# Altium PCB PCB1.PcbDoc
Units mm, origin at the board's own origin, x right, y up, seen from the top; angles counter-clockwise.
Board outline 66.17 x 88.65 mm, 2 copper layers (Top Layer, Bottom Layer); 17 components, 17 nets, 81 pads, 14 vias.
Unrouted connection lines stored in the file: 7.
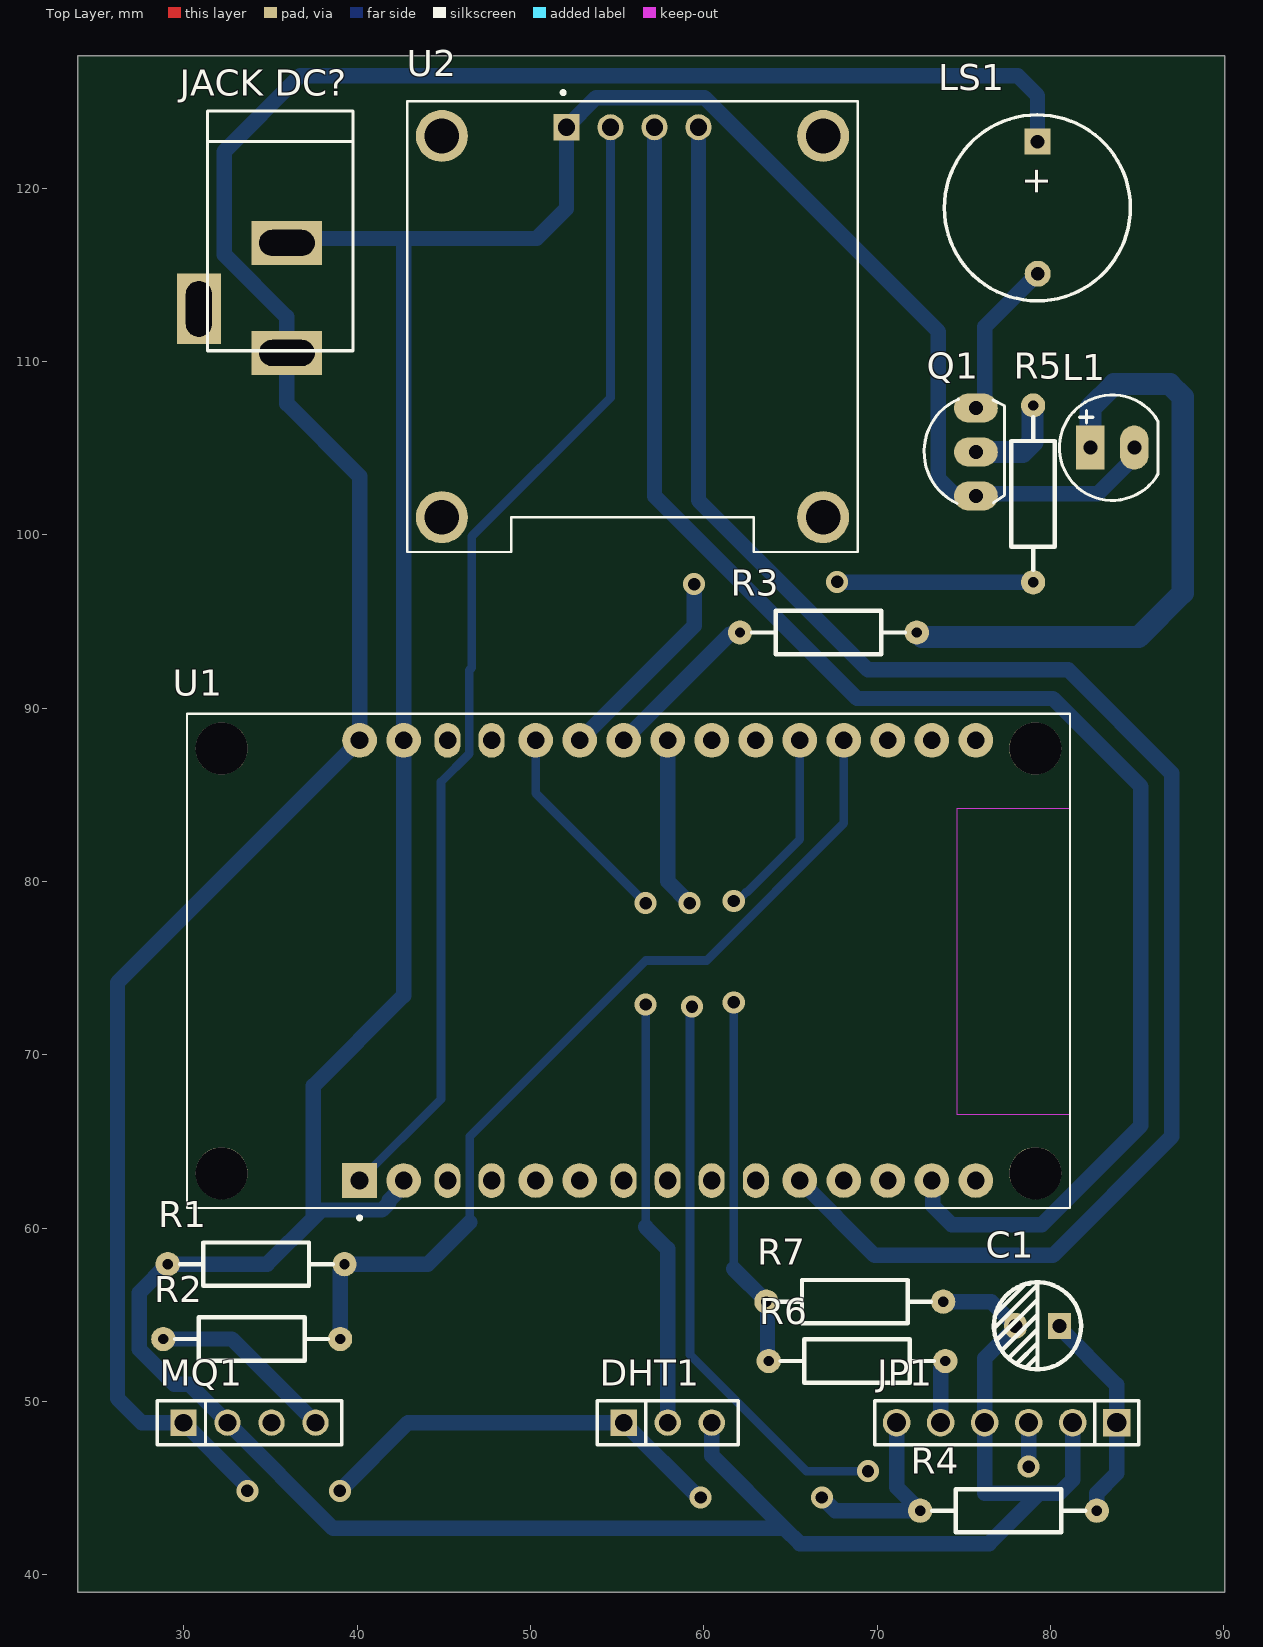
[diagram p0: Top Layer view]
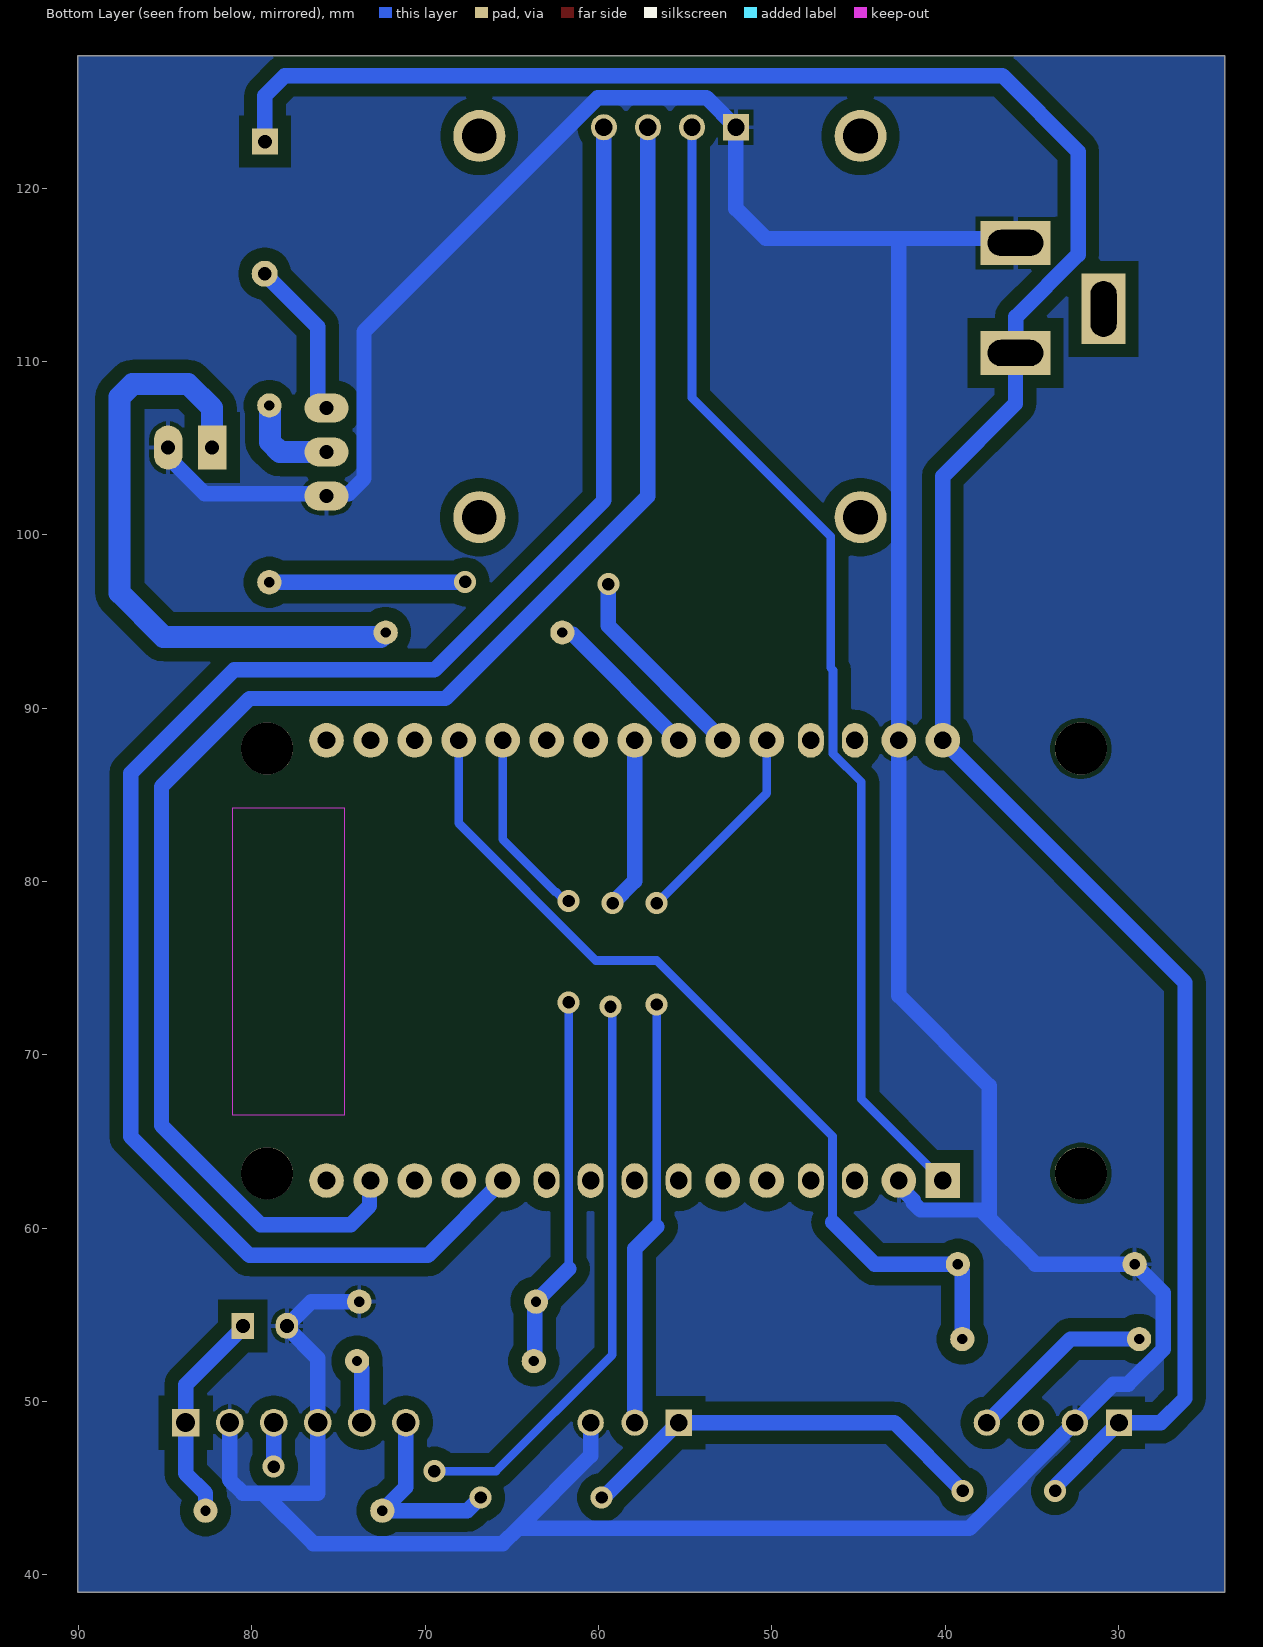
[diagram p1: Bottom Layer view, seen from below]
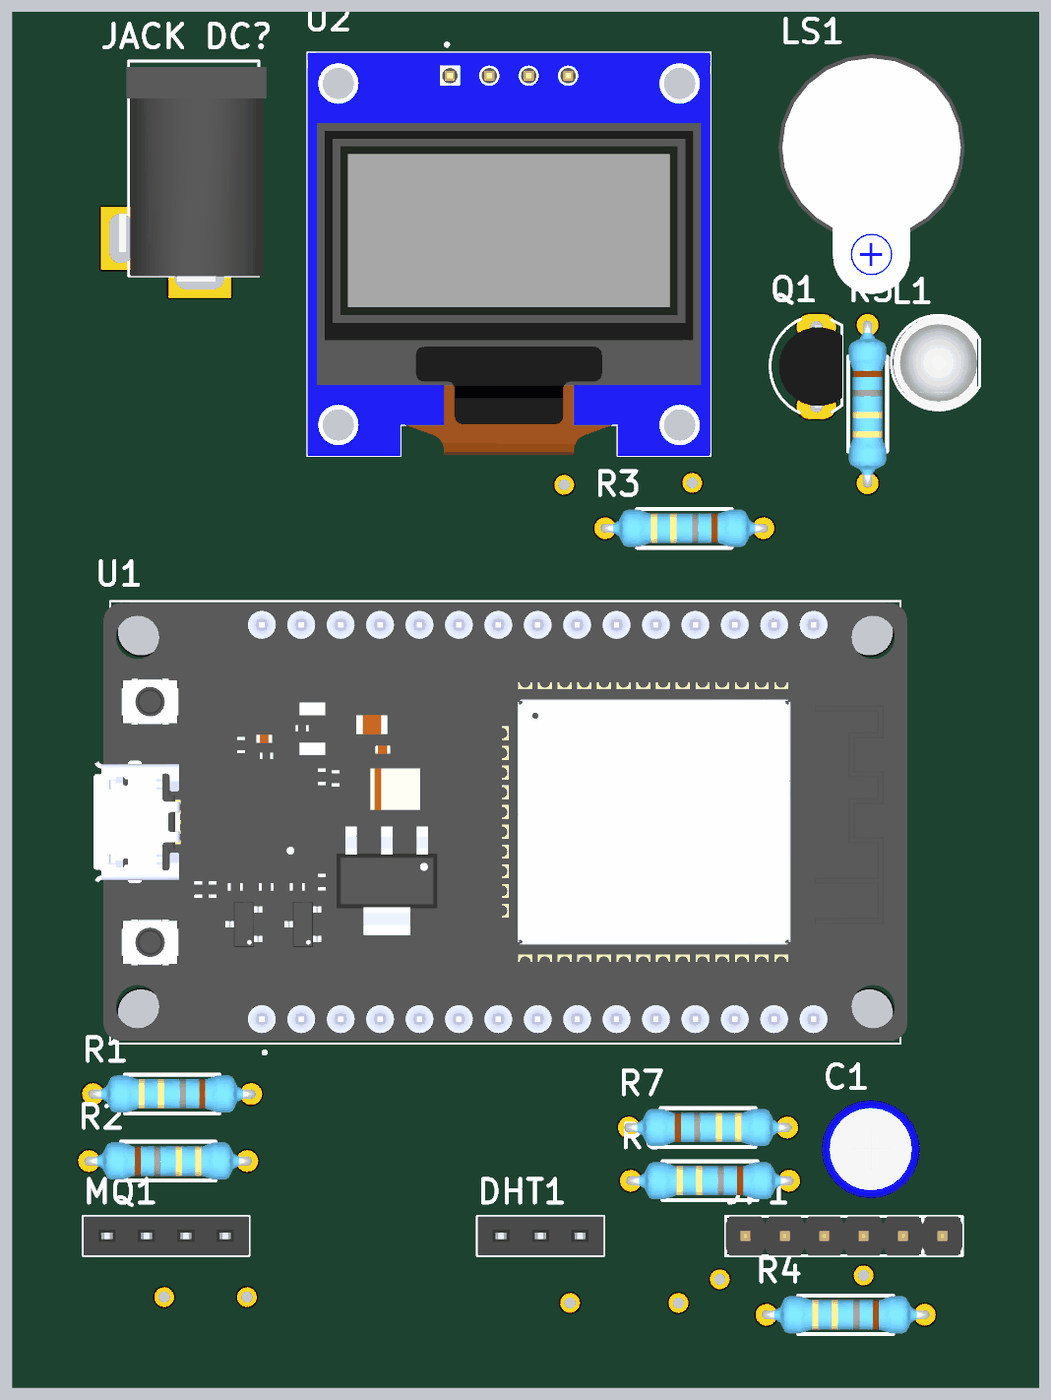
[diagram p2: 3D render of the assembled board from above, using the file's embedded part models]

## Layer stack, top to bottom
Top Solder: solder mask 0.0102, Solder Resist, Dk 3.5
Top Layer: signal copper 0.0356
Dielectric 1: dielectric 0.32, FR-4, Dk 4.8
Bottom Layer: signal copper 0.0356
Bottom Solder: solder mask 0.0102, Solder Resist, Dk 3.5

## Board outline
23.876,38.989 90.043,38.989 90.043,127.635 23.876,127.635

## Design rules (kind name [scope] priority, off if disabled: settings)
Clearance [All] p1: gap=0.254 ignorepadtopadclearanceinfootprint=FALSE except(0.762: Arc-Fill Arc-Poly Arc-Region Track-Fill Track-Poly Track-Region SMDPad-Fill SMDPad-Poly SMDPad-Region THPad-Fill THPad-Poly THPad-Region Via-Fill Via-Poly Via-Region Fill-Fill Fill-Poly Fill-Region Poly-Poly Poly-Region Region-Region)
PolygonConnect [All] p1: connectstyle=Relief reliefconductorwidth=0.254 reliefentries=4 polygonreliefangle="90 Angle" airgapwidth=0.254
RoutingLayers [All] p1: top layer_v5=FALSE bottom layer_v5=TRUE
RoutingVias [All] p1: holewidth=0.711 width=1.27 viastyle="Through Hole" minholewidth=0.711 minwidth=1.27 maxholewidth=0.711 maxwidth=1.27
SolderMaskExpansion [All] p1: expansion=0.102 istentingtop=FALSE
SupplyNets "Schematic Supply Nets_2" [InNet('+5')] p1: voltage=0.000
SupplyNets "Schematic Supply Nets_1" [InNet('GND')] p2: voltage=0.000
SupplyNets "Schematic Supply Nets" [InNet('3v3')] p3: voltage=0.000
Width [All] p1: maxlimit=1.27 minlimit=0.254 preferedwidth=0.889
29 further rules are at their usual default settings.

## Components (designator, comment, footprint, x,y, rotation, side; value= is the part's Value field where it differs from the comment)
C1 "100uF" "tu hoa 5mm" 79.248,54.356 r180 top
DHT1 "DHT22" "JP 1x3 CT" 55.372,48.768 r0 top
"JACK DC?" "JACK DC 5.5" "JACK DC 5.5" 33.401,113.665 r270 top value="Jac DC"
JP1 "JP 1x6 2.54" "JP 1x6 DT" 83.82,48.768 r180 top
L1 "LED 5mm" LED-5MM-RED 82.296,105.029 r0 top
LS1 "Coi Chip Speaker" "Coi Chip Speacker" 79.248,122.682 r270 top
MQ1 "MQ135" "JP 1x4 CT" 29.972,48.768 r0 top
Q1 "2N2222" TO92 75.692,104.775 r90 top value=C9014
R1 "39k" "tro vach 1/4w" 34.163,57.912 r0 top
R2 "22k" "tro vach 1/4w" 33.909,53.594 r180 top
R3 "220R" "tro vach 1/4w" 67.183,94.361 r0 top
R4 "180R" "tro vach 1/4w" 77.577,43.688 r0 top
R5 "1k" "tro vach 1/4w" 78.994,102.362 r90 top
R6 "22k" "tro vach 1/4w" 68.834,52.324 r0 top
R7 "39k" "tro vach 1/4w" 68.707,55.753 r180 top
U1 "ESP32-DEVKIT-V1" MODULE_ESP32_DEVKIT_V1 55.647,75.438 r90 top
U2 "DM-OLED096-636" MODULE_DM-OLED096-636 55.88,112.014 r0 top

## Footprints (in the part's own frame and the unit in brackets; to place one, negate y for a bottom-side part, rotate by r counter-clockwise, add the part's x,y. Pads: shape width x height; smd on the part's side, far side on the other; paste and mask are expansions set on the pad)
"Coi Chip Speacker" [mm]
  rect 1.5x1.5 hole 0.8: 1(0,0)
  round 1.5 hole 0.8: 2(7.62,0.013)
  silkscreen extent -1.55,-5.38 9.18,5.36, body extent -2.22,-6 13.24,6, height 4.5
"JACK DC 5.5" [mm] "Jac DC input"
  rect 2.54x4.064 hole 1.5 slot 3.2 at 90 deg: 1(3.175,2.54) 2(-3.175,2.54)
  rect 4.064x2.54 hole 1.5 slot 3.2 at 0 deg: 3(0.635,-2.54)
  silkscreen extent -10.8,-2.03 3.05,6.35, body extent -10.42,-2.67 3.4,6.84, height 11.02
"JP 1x3 CT" [mm]
  rect 1.52x1.52 hole 1.02: 1(0,0)
  round 1.52 hole 1.02: 2(2.54,0) 3(5.08,0)
  silkscreen extent -1.52,-1.27 6.6,1.27, body extent -1.52,-1.25 6.6,1.25, height 8.51
"JP 1x4 CT" [mm]
  rect 1.52x1.52 hole 1.02: 1(0,0)
  round 1.52 hole 1.02: 2(2.54,0) 3(5.08,0) 4(7.62,0)
  silkscreen extent -1.52,-1.27 9.14,1.27, body extent -1.52,-1.25 9.14,1.25, height 8.51
"JP 1x6 DT" [mm] "6 pins, 1 row, straight, gold plating"
  rect 1.6x1.6 hole 1.1: 1(0,0)
  round 1.6 hole 1.1: 2(2.54,0) 3(5.08,0) 4(7.62,0) 5(10.16,0) 6(12.7,0)
  silkscreen extent -1.27,-1.27 13.97,1.27, body extent -1.27,-1.27 13.97,1.27, height 8.54
LED-5MM-RED [mil] "LED 2 PIN, 5 ly , Only colour,pin to pin 100mil"
  rect 65x100 hole 32: 1(0,0)
  oval 65x100 hole 32: 2(100,0)
  silkscreen extent -70,-120 154,120, body extent -65,-119 149,118, height 339
MODULE_DM-OLED096-636 [mm]
  rect 1.508x1.508 / inner round 1.508 / far side rect 1.508x1.508 hole 1: 1(-3.81,11.5)
  round 1.508 hole 1: 2(-1.27,11.5) 3(1.27,11.5) 4(3.81,11.5)
  round 3 hole 2: S1(-11,11) S2(11,11) S3(11,-11) S4(-11,-11)
  silkscreen extent -13,-13 13,13.6, body extent -13,-13 13,13, height 5.66
MODULE_ESP32_DEVKIT_V1 [mm]
  rect 2x2 / inner round 2 / far side rect 2x2 hole 1.02: 1(-12.7,15.515)
  round 2 hole 1.02: 2(-12.7,12.975) 5(-12.7,5.355) 6(-12.7,2.815) 11(-12.7,-9.885) 12(-12.7,-12.425) 13(-12.7,-14.965) 14(-12.7,-17.505) 15(-12.7,-20.045) 16(12.7,-20.045) 17(12.7,-17.505) 18(12.7,-14.965) 19(12.7,-12.425) 20(12.7,-9.885) 21(12.7,-7.345) 22(12.7,-4.805) 23(12.7,-2.265) 24(12.7,0.275) 25(12.7,2.815) 26(12.7,5.355) 29(12.7,12.975) 30(12.7,15.515)
  oval 2x1.5 hole 1.02: 3(-12.7,10.435) 4(-12.7,7.895) 7(-12.7,0.275) 8(-12.7,-2.265) 9(-12.7,-4.805) 10(-12.7,-7.345) 27(12.7,7.895) 28(12.7,10.435)
  round 3 hole 3 unplated: ""(-12.28,23.475) ""(-12.28,-23.475) ""(12.23,23.475) ""(12.23,-23.475)
  Keep-Out Layer region: 8.78,-25.475 -8.91,-25.475 -8.91,-18.985 8.78,-18.985
  Keep-Out Layer region: 8.78,-25.475 -8.91,-25.475 -8.91,-18.985 8.78,-18.985
  silkscreen extent -14.95,-25.48 14.23,25.48, body extent -14.1,-25.9 14.1,26.55, height 7.05
TO92 [mil] "TO-92"
  oval 66x100 hole 32: 1(-100,0) 2(0,0) 3(100,0)
  silkscreen extent -117,-65 120,118, body extent -109,-66 109,95, height 245
"tro vach 1/4w" [mm]
  round 1.4 hole 0.6: 1(-5.1,0) 2(5.1,0)
  silkscreen extent -4.39,-1.25 4.42,1.25, body extent -5.38,-1.2 5.38,1.2, height 2.41
"tu hoa 5mm" [mm]
  rect 1.3x1.5 hole 0.8: 1(-1.27,0)
  oval 1.3x1.5 hole 0.8: 2(1.27,0)
  silkscreen extent -2.51,-2.51 2.51,2.51, body extent -3.12,-3.18 3.23,3.18, height 14.55

## Part data
C1: library part "Tu Hoa 100uF 25V 6x11", "Cắm", Chung_Loai=Cắm, Don_Vi=Con, Ma_Hang=MH001351, So_Chan=2, Ten_Linh_Kien="Tụ Hóa 100uF 25V 6x11MM"
DHT1: library part "JP 1x3 2.54 Cai Thang", "Cắm", Chung_Loai=Cắm, Don_Vi=Con, Ma_Hang=MH004006, Ten_Linh_Kien="Jump Đơn Cái 2.54MM 1x20P Thẳng"
JP1: library part "JP 1x6 2.54 Duc Thang", "Cắm", Chung_Loai=Cắm, Don_Vi=Con, Ma_Hang=MH000903, Ten_Linh_Kien="Jump Đơn Đực 2.54MM 1x40P Thẳng 11MM"
L1: library part "LED 5mm Do", "Cắm", Chung_Loai=Cắm, Don_Vi=Con, Ma_Hang=MH008967, Ten_Linh_Kien="Led 5MM Phủ Đỏ (1000c)"
LS1: "Còi chip"
MQ1: library part "JP 1x4 2.54 Cai Thang", "Cắm", Chung_Loai=Cắm, Don_Vi=Con, Ma_Hang=MH004006, Ten_Linh_Kien="Jump Đơn Cái 2.54MM 1x20P Thẳng"
Q1: library part "Trans 2N3904", "NPN transistor EBC"
R1 R7: library part "Tro Vach 1/4W 5% 39k", "Cắm", Chung_Loai=Cắm, Don_Vi=Con, Ma_Hang=MH007314, So_Chan=2, Ten_Linh_Kien="Trở Vạch 1/4w 5% 39k"
R2 R6: library part "Tro Vach 1/4W 5% 22k", "Cắm", Chung_Loai=Cắm, Don_Vi=Con, Ma_Hang=MH007301, So_Chan=2, Ten_Linh_Kien="Trở Vạch 1/4w 5% 22k"
R3: library part "Tro Vach 1/4W 5% 220R", "Cắm", Chung_Loai=Cắm, Don_Vi=Con, Ma_Hang=MH007300, So_Chan=2, Ten_Linh_Kien="Trở Vạch 1/4w 5% 220R"
R4: library part "Tro Vach 1/4W 5% 180R", "Cắm", Chung_Loai=Cắm, Don_Vi=Con, Ma_Hang=MH007290, So_Chan=2, Ten_Linh_Kien="Trở Vạch 1/4w 5% 180R"
R5: library part "Tro Vach 1/4W 5% 1k", "Cắm", Chung_Loai=Cắm, Don_Vi=Con, Ma_Hang=MH007390, So_Chan=2, Ten_Linh_Kien="Trở Vạch 1/4w 5% 1k"
U1: "Dual core, Wi-Fi: 2.4 GHz up to 150 Mbits/s,BLE (Bluetooth Low Energy) and legacy Bluetooth, 32 bits, Up to 240 MHz", Package=None, Check_prices=https://www.snapeda.com/parts/ESP32-DEVKIT-V1/Do+it/view-part/?ref=eda, MF="Do it", MP=ESP32-DEVKIT-V1, SnapEDA_Link=https://www.snapeda.com/parts/ESP32-DEVKIT-V1/Do+it/view-part/?ref=snap
U2: "0.96â€ 128 X 64 MONOCHROME GRAPHIC OLED DISPLAY MODULE - I2C", Package=Package, Check_prices=https://www.snapeda.com/parts/DM-OLED096-636/Display+Module/view-part/?ref=eda, MF="Display Module", MP=DM-OLED096-636, SnapEDA_Link=https://www.snapeda.com/parts/DM-OLED096-636/Display+Module/view-part/?ref=snap

## Via types
v1: diameter 1.27, hole 0.711, Top Layer to Bottom Layer, 14 vias

## Nets (pads, with @x,y where several pads share a name; then routed paths per layer and width w, separated by ;. In a path a pad name is that pad's centre, name@x,y a point inside that pad or via, vN(x,y) a via of type N, cw(c..) or ccw(c..) an arc to the next point about the centre after c; other vN are vias at no path point)
3v3: U1.1 U2.2 | length 66.8
  Bottom Layer w0.5: U1.1 44.831,67.437 44.831,85.734 46.466,87.369 46.466,92.186 46.609,92.329 46.609,99.909 54.61,107.91 U2.2
+5: "JACK DC?.1" DHT1.1 JP1.6 LS1.1 MQ1.1 R4.1 U1.30 | length 178.8
  Bottom Layer w0.889: v1@33.655,44.704 33.582,44.777 33.582,45.158 MQ1.1 27.559,48.768 26.162,50.165 26.162,74.168 U1.30 40.132,103.378 35.941,107.569 35.941,110.49 35.918,110.513 35.918,112.573 32.323,116.168 32.323,122.112 36.703,126.492 78.098,126.492 79.248,125.342 LS1.1 ; v1(38.989,44.831) 42.926,48.768 DHT1.1 v1@59.817,44.323 ; v1(66.802,44.45) 67.564,43.688 R4.1 71.12,45.045 JP1.6
  other v1: 59.817,44.45 33.655,44.831
BUZZER: R5.1 U1.25 | length 23.1
  Bottom Layer w0.889: U1.25 59.436,94.742 v1(59.436,97.155) ; v1(67.691,97.282) 67.701,97.272 78.984,97.272 R5.1
DHT22: DHT1.2 U1.26 | length 36.7
  Bottom Layer w0.5: U1.26 50.292,85.09 v1(56.642,78.74) ; 56.642,60.071 v1(56.642,72.898)
  Bottom Layer w0.889: 56.642,60.071 57.912,58.801 DHT1.2
GND: "JACK DC?.2" C1.2 DHT1.3 JP1.2 JP1.4 L1.2 MQ1.2 Q1.1 R1.1 R7.1 U1.2 U1.29 U2.1 | length 240.5
  Bottom Layer w0.889: 35.941,117.094 42.545,117.094 ; U1.2 42.672,62.437 41.831,61.596 41.831,61.449 41.421,61.039 37.921,61.039 37.465,60.583 ; DHT1.3 60.452,46.863 64.643,42.672 ; R7.1 76.57,55.753 77.967,54.356 C1.2 77.978,54.256 76.2,52.478 JP1.4 76.2,44.704 79.375,44.704 ; JP1.2 81.28,45.466 80.518,44.704 79.375,44.704 ; L1.2 84.836,104.486 82.712,102.362 74.422,102.362 73.533,103.251 73.533,111.725 60.036,125.222 53.778,125.222 U2.1 52.07,118.816 50.348,117.094 42.545,117.094 ; 37.465,60.583 37.465,68.199 42.672,73.406 U1.29 42.672,116.967 42.545,117.094 ; 37.465,60.583 34.794,57.912 R1.1 27.41,56.259 27.41,53.015 29.439,50.986 30.294,50.986 MQ1.2 38.608,42.672 64.643,42.672 ; 64.643,42.672 65.532,41.783 76.454,41.783 79.375,44.704
"LED ": R3.1 U1.24 | length 9.3
  Bottom Layer w0.889: U1.24 61.497,94.263 61.985,94.263 R3.1
LEDCONTROL: JP1.3 U1.23 | length 45.6
  Bottom Layer w0.5: v1(59.309,72.771) 59.198,72.66 59.198,52.689 65.913,45.974 v1(69.469,45.974)
  Bottom Layer w0.889: U1.23 57.912,80.01 v1(59.182,78.74) ; v1(78.74,46.228) JP1.3
MQ135: R1.2 R2.1 U1.19 | length 51.5
  Bottom Layer w0.5: 46.498,60.341 46.498,65.294 56.642,75.438 60.158,75.438 68.072,83.352 U1.19
  Bottom Layer w0.889: R2.1 39.009,57.52 39.263,57.774 R1.2 44.069,57.912 46.498,60.341
NetC1_1: C1.1 JP1.1 R4.2 | length 12.5
  Bottom Layer w0.889: C1.1 80.518,54.256 83.82,50.954 JP1.1 83.82,45.838 82.677,44.695 R4.2
NetJP1_5: JP1.5 R6.2 | length 3.7
  Bottom Layer w0.889: JP1.5 73.66,51.912 73.934,52.186 R6.2
NetL1_1: L1.1 R3.2 | length 36.3
  Bottom Layer w1.27: R3.2 72.318,94.361 72.572,94.107 85.09,94.107 87.63,96.647 87.63,107.95 86.886,108.694 83.675,108.694 82.296,107.315 L1.1
NetLS1_2: LS1.2 Q1.3 | length 8.9
  Bottom Layer w0.889: Q1.3@76.2,107.442 76.2,112.001 LS1.2
NetMQ1_4: MQ1.4 R2.2 | length 10.8
  Bottom Layer w0.889: R2.2 32.766,53.594 MQ1.4
NetQ1_2: Q1.2 R5.2 | length 5.6
  Bottom Layer w1.27: Q1.2 78.377,104.775 78.969,105.367 78.969,107.437 R5.2
SCL: U1.14 U2.3 | length 92.2
  Bottom Layer w0.889: U2.3 57.15,102.235 68.834,90.551 80.137,90.551 85.217,85.471 85.217,65.913 79.502,60.198 74.295,60.198 73.215,61.278 73.215,62.675 U1.14
SDA: U1.11 U2.4 | length 102.4
  Bottom Layer w0.889: U2.4 59.69,101.981 69.469,92.202 81.026,92.202 86.995,86.233 86.995,65.278 80.137,58.42 69.85,58.42 U1.11
V0: R6.1 R7.2 U1.20 | length 32.5
  Bottom Layer w0.5: 61.722,57.638 v1(61.722,73.025) ; v1(61.722,78.867) 61.93,78.867 62.429,79.366 62.475,79.366 65.532,82.423 U1.20
  Bottom Layer w0.889: 61.722,57.638 R7.2 63.67,55.689 63.67,52.387 R6.1
pads on no net: "JACK DC?.3" MQ1.3 U1. U1.3 U1.4 U1.5 U1.6 U1.7 U1.8 U1.9 U1.10 U1.12 U1.13 U1.15 U1.16 U1.17 U1.18 U1.21 U1.22 U1.27 U1.28 U2.S1 U2.S2 U2.S3 U2.S4

## Polygon pours and split planes (outlines as drawn)
GND on Bottom Layer "NONET_L-01_P-001" (solid, remove dead copper, pour order 0): 23.876,127.635 90.043,127.635 90.043,38.989 23.876,38.989

## Text inside footprints (layer, text, board x,y; h text height)
LS1: Top Overlay "+" at 78.537,121.272 h1.52 r270